# EAGLE board MCU_integrated (EAGLE 8.4.1)
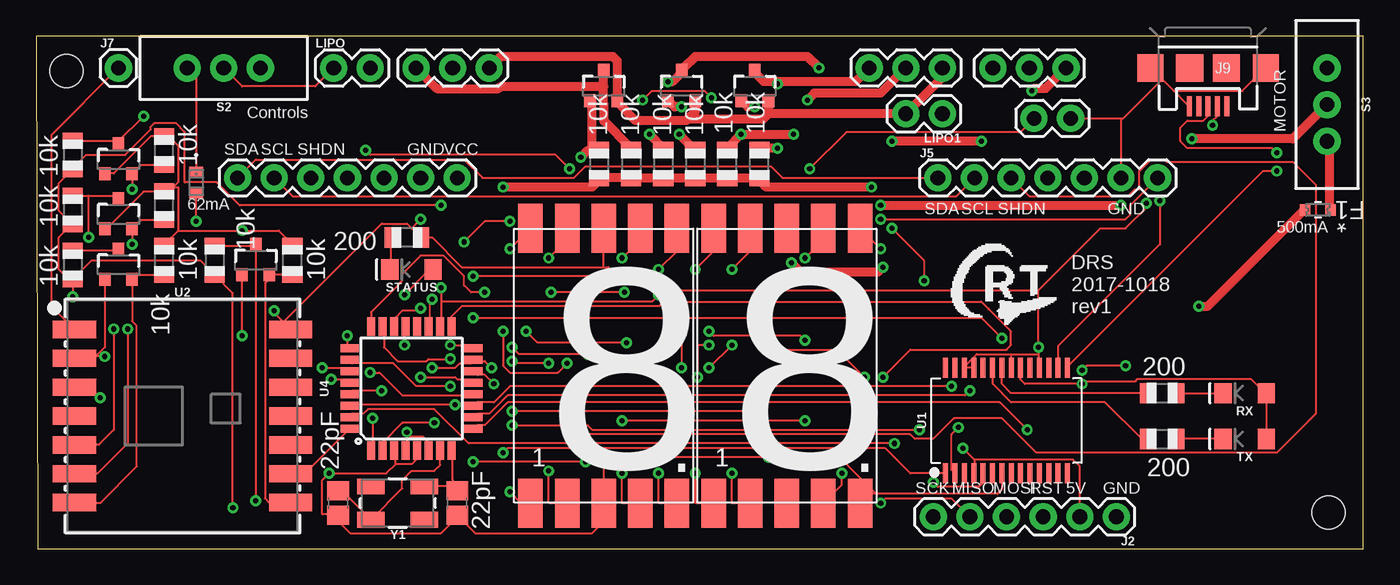
[diagram p0: board, top side]
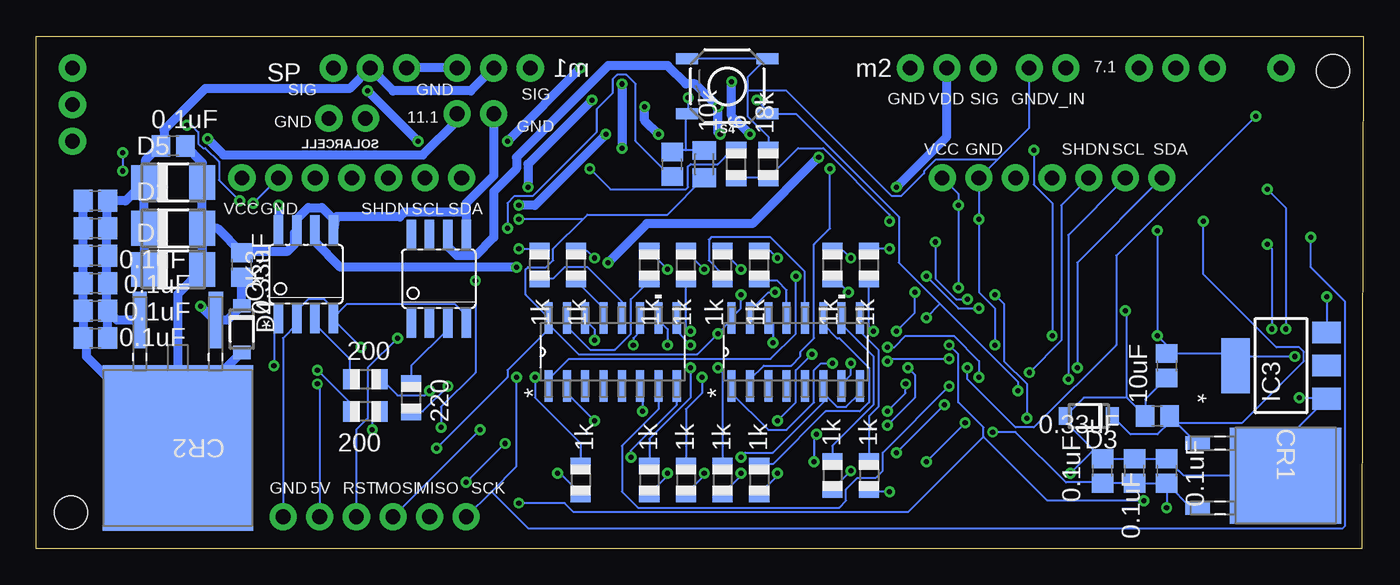
[diagram p1: board, bottom side, seen from below]

Size 92.06 x 35.55 mm. Coordinates in mm from the lower left corner, seen from the top.
Outline: 0.1,0 92.06,0 92.06,35.55 0,35.55 0.1,0
Copper layers (1*16): Top 0.035mm / dielectric 1.5mm / Bottom 0.035mm
Design rules "default": minimum track width 6mil, minimum drill 0.35mm, track to track 6mil, track to pad 6mil, pad to pad 6mil, via to via 6mil, smd to smd 6mil, copper to edge 40mil, drill to drill 6mil, minimum pad ring 10mil, minimum via ring 8mil, stop-mask expansion 4mil, vias tented up to drill 0mil, thermal gap 10mil
Net classes: 1 motor: width 0.61 mm
Holes 2.29 mm at 89.65,2.52 2.1,33.14

## Footprints (pad centres in the part's own frame; a part is rotated, then mirrored left to right if it is on the bottom)
R0805 = smd 1.1 x 1.4: 1 -1,0; 2 1,0
C0805 = smd 1.3 x 1.5: 1 -0.85,0; 2 0.85,0
DPAK = smd 0.94 x 1.702: 1 -2.25,-6.109; 2 2.25,-6.109 | smd 6.655 x 7.722: 3 0,0
D2PAK = smd 0.991 x 3.912: 1 -2.64,-8.877; 3 2.64,-8.877 | smd 10.439 x 11.455: 2 0,0
DO-214AC = smd 1.8 x 2.4: A 2.025,0; C -2.025,0
SOD123FL = smd 0.91 x 1.22: A 1.625,0; C -1.625,0
0467SERIES = smd 0.737 x 0.813: 1 -0.889,0; 2 0.889,0
0603 = smd 0.711 x 0.965: 1 -0.724,0; 2 0.724,0
SOT223 = smd 1.5 x 2: 1 -2.3,-3.15; 2 0,-3.15; 3 2.3,-3.15 | smd 3.8 x 2: 4 0,3.15
1X06 = drill 1.016 pad 1.88: 1 0,0; 2 2.54,0; 3 5.08,0; 4 7.62,0; 5 10.16,0; 6 12.7,0
1X07 = drill 1.016 pad 1.88: 1 0,0; 2 2.54,0; 3 5.08,0; 4 7.62,0; 5 10.16,0; 6 12.7,0; 7 15.24,0
1X01 = drill 1.016 pad 1.88: 1 0,0
USB-MICROB = smd 0.35 x 1.4: D+ 0,2.65; D- -0.65,2.65; GND 1.3,2.65; ID 0.65,2.65; VBUS -1.3,2.65 | smd 1.8 x 1.9: MT1 -4,0; MT2 4,0 | smd 1.9 x 1.9: P$1 -1.27,0; P$2 1.27,0
1X02 = drill 1.016 pad 1.88: 1 0,0; 2 2.54,0
1X03 = drill 1.016 pad 1.88: 1 0,0; 2 2.54,0; 3 5.08,0
SOIC08 = smd 0.66 x 2.032: 1 -1.905,-3.073; 2 -0.635,-3.073; 3 0.635,-3.073; 4 1.905,-3.073; 5 1.905,3.073; 6 0.635,3.073; 7 -0.635,3.073; 8 -1.905,3.073
ACSC56 = smd 1.7 x 3.4: PIN1 -5.08,-9.525; PIN2 -2.54,-9.525; PIN3 0,-9.525; PIN4 2.54,-9.525; PIN5 5.08,-9.525; PIN6 5.08,9.525; PIN7 2.54,9.525; PIN8 0,9.525; PIN9 -2.54,9.525; PIN10 -5.08,9.525
SOT23-3 = smd 0.8 x 0.9: 1 -0.95,-1; 2 0.95,-1; 3 0,1.1
M0805 = smd 1.3 x 1.6: 1 -0.95,0; 2 0.95,0
LED-1206 = smd 1.2 x 1.4: A -1.5,0; C 1.5,0
SWITCH_SPDT_PTH_11.6X4.0MM = drill 1.016 pad 1.88: 1 0,2.54; 2 0,0; 3 0,-2.54
TACTILE_SWITCH_SMD_5.2MM = smd 1.524 x 0.762: 1 -2.794,1.905; 2 2.794,1.905; 3 -2.794,-1.905; 4 2.794,-1.905
SSOP28DB = smd 0.348 x 1.397: 1 -4.225,-3.656; 2 -3.575,-3.656; 3 -2.925,-3.656; 4 -2.275,-3.656; 5 -1.625,-3.656; 6 -0.975,-3.656; 7 -0.325,-3.656; 8 0.325,-3.656; 9 0.975,-3.656; 10 1.625,-3.656; 11 2.275,-3.656; 12 2.925,-3.656; 13 3.575,-3.656; 14 4.225,-3.656; 15 4.225,3.656; 16 3.575,3.656; 17 2.925,3.656; 18 2.275,3.656; 19 1.625,3.656; 20 0.975,3.656; 21 0.325,3.656; 22 -0.325,3.656; 23 -0.975,3.656; 24 -1.625,3.656; 25 -2.275,3.656; 26 -2.925,3.656; 27 -3.575,3.656; 28 -4.225,3.656
RFM69CW-XXXS2 = smd 3 x 1.2: 1 -7.5,6; 2 -7.5,4; 3 -7.5,2; 4 -7.5,0; 5 -7.5,-2; 6 -7.5,-4; 7 -7.5,-6; 8 7.5,-6; 9 7.5,-4; 10 7.5,-2; 11 7.5,0; 12 7.5,2; 13 7.5,4; 14 7.5,6
D16 = smd 2.184 x 0.559: 1 -2.362,4.445; 2 -2.362,3.175; 3 -2.362,1.905; 4 -2.362,0.635; 5 -2.362,-0.635; 6 -2.362,-1.905; 7 -2.362,-3.175; 8 -2.362,-4.445; 9 2.362,-4.445; 10 2.362,-3.175; 11 2.362,-1.905; 12 2.362,-0.635; 13 2.362,0.635; 14 2.362,1.905; 15 2.362,3.175; 16 2.362,4.445
TQFP32-08 = smd 1.27 x 0.559: 1 -4.293,2.8; 2 -4.293,2; 3 -4.293,1.2; 4 -4.293,0.4; 5 -4.293,-0.4; 6 -4.293,-1.2; 7 -4.293,-2; 8 -4.293,-2.8; 17 4.293,-2.8; 18 4.293,-2; 19 4.293,-1.2; 20 4.293,-0.4; 21 4.293,0.4; 22 4.293,1.2; 23 4.293,2; 24 4.293,2.8 | smd 0.559 x 1.27: 9 -2.8,-4.293; 10 -2,-4.293; 11 -1.2,-4.293; 12 -0.4,-4.293; 13 0.4,-4.293; 14 1.2,-4.293; 15 2,-4.293; 16 2.8,-4.293; 25 2.8,4.293; 26 2,4.293; 27 1.2,4.293; 28 0.4,4.293; 29 -0.4,4.293; 30 -1.2,4.293; 31 -2,4.293; 32 -2.8,4.293
CRYSTAL-SMD-5X3.2-4PAD = smd 1.9 x 1.1: 1 -1.85,-1.15; 2 1.85,-1.15; 3 1.85,1.15; 4 -1.85,1.15

## Placement (x,y rotation side)
1K1  1k  [R0805]  44.45,19.68 90 bottom
1K2  1k  [R0805]  41.91,4.76 270 bottom
1K3  1k  [R0805]  36.83,5.08 270 bottom
1K4  1k  [R0805]  34.29,5.08 270 bottom
1K5  1k  [R0805]  36.83,19.68 90 bottom
1K6  1k  [R0805]  34.29,19.68 90 bottom
1K7  1k  [R0805]  44.45,4.76 270 bottom
1K8  1k  [R0805]  54.61,19.68 90 bottom
1K9  1k  [R0805]  57.15,19.68 90 bottom
1K10  1k  [R0805]  54.29,4.76 270 bottom
1K11  1k  [R0805]  49.53,4.76 270 bottom
1K12  1k  [R0805]  46.99,4.76 270 bottom
1K13  1k  [R0805]  49.53,19.68 90 bottom
1K14  1k  [R0805]  46.99,19.68 90 bottom
1KR  1k  [R0805]  41.91,19.68 90 bottom
C1  22pF  [C0805]  20.95,3.17 90 top
C2  22pF  [C0805]  29.21,3.17 90 top
C3  0.1uF  [C0805]  13.65,5.4 90 bottom
C4  0.1uF  [C0805]  47.94,26.67 270 bottom
C5  0.1uF  [C0805]  87.95,20.32 180 bottom
C6  0.1uF  [C0805]  87.95,16.51 0 bottom
C7  0.1uF  [C0805]  87.95,18.41 0 bottom
C8  0.1uF  [C0805]  87.95,14.61 180 bottom
C9  0.33uF  [C0805]  14.29,9.21 180 bottom
C10  0.1uF  [C0805]  18.1,5.4 90 bottom
C11  0.33uF  [C0805]  77.79,19.68 90 bottom
C12  0.1uF  [C0805]  87.95,24.13 180 bottom
C13  0.1uF  [C0805]  15.88,5.4 90 bottom
C14  10uF  [C0805]  13.65,12.7 270 bottom
C15  0.1uF  [C0805]  82.55,27.94 0 bottom
C16  0.1uF  [C0805]  87.95,22.23 180 bottom
CR1  L7805CDT-TR  [DPAK]  5.4,5.08 270 bottom
CR2  L7806CD2T-TR  [D2PAK]  82.23,6.99 180 bottom
D1  [DO-214AC]  82.55,19.37 0 bottom
D2  [DO-214AC]  82.55,22.23 0 bottom
D3  SMF5.0AT1  [SOD123FL]  19.05,9.21 180 bottom
D4  SMF5.0AT1  [SOD123FL]  77.79,15.24 270 bottom
D5  [DO-214AC]  82.55,25.4 0 bottom
F1  6V/.4A  [0467SERIES]  88.9,23.5 180 top
F2  5V/80mA  [0603]  11.11,25.4 270 top
IC3  LD117AS25TR  [SOT223]  5.71,12.7 90 bottom
J2  [1X06]  74.93,2.22 180 top
J4  [1X07]  13.97,25.72 0 top
J5  [1X07]  62.55,25.72 0 top
J7  [1X01]  5.71,33.34 0 top
J9  USB-MICROB  [USB-MICROB]  81.28,33.34 180 top
LIPO  [1X02]  20.64,33.34 0 top
LIPO1  [1X02]  62.87,30.16 180 top
M1  m2  [1X03]  26.35,33.34 0 top
M2  SP  [1X03]  71.44,33.34 180 top
M3  m1  [1X03]  57.78,33.34 0 top
OK1  ILD205  [SOIC08]  64.14,18.73 0 bottom
OK3  ILD205  [SOIC08]  73.34,19.05 0 bottom
ONES  ACSC56SMT  [ACSC56]  39.37,12.7 0 top
Q1  220mA/50V/3.5Ω  [SOT23-3]  15.24,20 0 top
Q2  220mA/50V/3.5Ω  [SOT23-3]  5.71,19.68 0 top
Q4  220mA/50V/3.5Ω  [SOT23-3]  5.71,26.99 0 top
Q5  220mA/50V/3.5Ω  [SOT23-3]  5.71,23.18 0 top
Q7  220mA/50V/3.5Ω  [SOT23-3]  44.77,32.07 0 top
Q8  220mA/50V/3.5Ω  [SOT23-3]  39.37,32.07 0 top
Q9  220mA/50V/3.5Ω  [SOT23-3]  49.85,32.07 0 top
R1  220  [R0805]  66.04,10.48 90 bottom
R2  200  [R0805]  69.22,9.53 180 bottom
R3  10k  [R0805]  39.05,26.67 270 top
R4  10k  [R0805]  41.27,26.67 270 top
R5  10k  [R0805]  47.94,26.67 90 top
R6  200  [R0805]  69.22,11.75 180 bottom
R7  10k  [R0805]  50.16,26.67 90 top
R8  6  [R0805]  43.5,26.67 90 bottom
R9  18k  [R0805]  41.27,26.67 90 bottom
R10  10k  [R0805]  45.72,26.67 270 top
R11  10k  [R0805]  43.5,26.67 270 top
R14  10k  [R0805]  12.38,20 270 top
R15  10k  [R0805]  2.54,23.5 270 top
R16  10k  [M0805]  45.72,26.67 270 bottom
R17  200  [R0805]  78.11,7.62 0 top
R18  10k  [R0805]  8.89,23.81 90 top
R19  10k  [R0805]  17.78,20 90 top
R20  10k  [R0805]  8.89,27.62 90 top
R21  10k  [R0805]  2.54,19.68 270 top
R22  200  [R0805]  78.11,10.79 0 top
R23  200  [R0805]  25.72,21.59 180 top
R25  10k  [R0805]  8.89,20 90 top
R26  10k  [R0805]  2.54,27.3 270 top
RX  [LED-1206]  83.82,10.79 180 top
S2  [SWITCH_SPDT_PTH_11.6X4.0MM]  13.02,33.34 90 top
S3  [SWITCH_SPDT_PTH_11.6X4.0MM]  89.53,30.8 180 top
S4  MOMENTARY-SWITCH-SPST-SMD-5.2-REDUNDANT  [TACTILE_SWITCH_SMD_5.2MM]  44.13,32.07 180 bottom
SOLARCELL  [1X02]  69.22,29.84 0 top
STATUS  [LED-1206]  26.04,19.37 180 top
TENTHS  ACSC56SMT  [ACSC56]  52.07,12.7 0 top
TX  [LED-1206]  83.82,7.62 180 top
U1  FT232RL  [SSOP28DB]  67.31,8.89 0 top
U2  915MHz  [RFM69CW-XXXS2]  10.16,9.21 0 top
U3  SN74LS247_D_16  [D16]  39.37,13.65 90 bottom
U4  ATMEGA328P_TQFP  [TQFP32-08]  26.04,11.11 90 top
U5  SN74LS247_D_16  [D16]  52.07,13.65 90 bottom
Y1  16MHz  [CRYSTAL-SMD-5X3.2-4PAD]  25.08,3.17 180 top

## Library data of the parts
1K1-1K14 1KR C1-C16 R1-R11 R14-R23 R25 R26 = adafruit
CR1 = 7805; MANUFACTURER_PART_NUMBER: L7805CDTTR; VENDOR: ST Microelectronics
CR2 = 7806; MANUFACTURER_PART_NUMBER: L7806CD2TTR; VENDOR: ST Microelectronics
D1-D5 = diode
F1 = fuse0603_groove; MANUFACTURER_PART_NUMBER: 0467.500NRHF; VENDOR: Littelfuse Inc
F2 = fuse0603; MANUFACTURER_PART_NUMBER: F0603G0R10FNTR; VENDOR: AVX Corporation
IC3 = v-reg
J2 = SparkFun-Connectors; PROD_ID: CONN-08437
J4 J5 J7 LIPO LIPO1 SOLARCELL = SparkFun-Connectors
J9 = SparkFun-Retired; PROD_ID: CONN-09505
M1-M3 = SparkFun-Electromechanical
OK1 OK3 = optocoupler; MF: VISHAY/TELEFUNKEN; MPN: ILD205T; OC_FARNELL: 1469512; OC_NEWARK: 20H8678
ONES TENTHS = Feesta-parts
Q1 Q2 Q4 Q5 Q7-Q9 = SparkFun-DiscreteSemi; PROD_ID: TRANS-00830
RX STATUS TX = SparkFun-LED
S2 S3 = SparkFun-Switches; PROD_ID: SWCH-08261; SF_SKU: COM-00102
S4 = SparkFun-Switches; PROD_ID: SWCH-08247; SF_SKU: COM-08720
U1 = SparkFun-IC-Comms; PROD_ID: IC-00870
U2 = SparkFun-RF; PROD_ID: IC-11996
U3 U5 = BCD7Decoder; DATASHEETURL: httpwww.ti.comlitgpnSN74LS247; FAMILY_NAME: DECODERDEMULTIPLEXER; GENERIC_PART_NUMBER: SN74LS247; INDUSTRY_STD_PKG_TYPE: SOIC; MANUFACTURER: Texas Instruments; PACKAGE_DESIGNATOR: D; PIN_COUNT: 16
U4 = SparkFun-IC-Microcontroller; PROD_ID: IC-09069
Y1 = SparkFun-Clocks; PROD_ID: XTAL-08218; SF_ID: COM-00094

## Nets
1_A: 1KR.2 ONES.PIN7
1_B: 1K1.2 ONES.PIN6
1_C: 1K2.2 ONES.PIN4
1_D: 1K3.2 ONES.PIN2
1_DP: 1K7.2 ONES.PIN5
1_E: 1K4.2 ONES.PIN1
1_F: 1K5.2 ONES.PIN9
1_G: 1K6.2 ONES.PIN10
3.3MISO: Q1.2 R19.1 U2.8
3.3MOSI: Q4.2 R20.1 U2.5
3.3NSS: Q2.2 R25.1 U2.7
3.3SCK: Q5.2 R18.1 U2.6
3.3VCC: C14.1 IC3.4 Q1.1 Q2.1 Q4.1 Q5.1 R18.2 R19.2 R20.2 R25.2 U2.2
6V_POWER [motor]: C5.1 C6.2 C7.2 C8.1 C12.1 C15.1 C16.1 CR2.3 D1.C D2.C D5.C M1.2 M2.2 M3.2 R3.2 R4.2 R5.1 R7.1 R10.2 R11.2
10_A: 1K8.2 TENTHS.PIN7
10_B: 1K9.2 TENTHS.PIN6
10_C: 1K10.2 TENTHS.PIN4
10_D: 1K11.2 TENTHS.PIN2
10_E: 1K12.2 TENTHS.PIN1
10_F: 1K13.2 TENTHS.PIN9
10_G: 1K14.2 TENTHS.PIN10
A1: U3.7 U4.23
A2: U4.26 U5.7
ANT: J7.1 U2.1
B1: U3.1 U4.24
B2: U4.22 U5.1
C1: U3.2 U4.25
C2: U4.13 U5.2
D2: U4.14 U5.6
D4: J5.3 U4.2
D8: J4.3 U4.12
D-: J9.D- U1.16
DRAIN1 [motor]: M3.1 Q9.3 R7.2
DRAIN2 [motor]: M1.1 Q8.3 R4.1
DRAIN3 [motor]: M2.1 Q7.3 R11.1
GND: C1.1 C2.1 C3.2 C9.2 C10.2 C13.2 C14.2 CR1.3 D3.A IC3.1 J2.1 J4.6 J5.6 J9.GND J9.MT1 J9.MT2 LIPO.2 OK1.4 OK3.2 OK3.4 ONES.PIN3 ONES.PIN8 R9.2 R23.1 S4.3 S4.4 SOLARCELL.2 TENTHS.PIN5 U1.7 U1.18 U1.21 U1.25 U1.26 U2.3 U2.14 U3.6 U3.8 U4.3 U4.5 U4.21 U5.8
INT: U2.9 U4.32
M1_SIG: R2.1 U4.9
M2_SIG: R6.1 U4.10
MGND [motor]: C5.2 C6.1 C7.1 C8.2 C11.2 C12.2 C15.2 C16.2 CR2.2 D1.A D2.A D4.A D5.A LIPO1.2 M1.3 M2.3 M3.3 OK1.5 OK3.5 OK3.7 Q7.2 Q8.2 Q9.2
MISO: J2.5 Q1.3 R14.1 U4.16
MOSI: J2.4 Q4.3 R26.1 U4.15
N$1: R22.2 RX.C
N$2: R17.2 TX.C
N$3: R17.1 U1.23
N$4: C1.2 U4.7 Y1.3
N$5: C2.2 U4.8 Y1.1
N$6: R8.2 SOLARCELL.1
N$7: R23.2 STATUS.C
N$8: OK1.3 R1.2
N$9: OK3.1 R2.2
N$10: STATUS.A U4.1
N$13: J9.D+ U1.15
N$15: C4.2 U1.2
N$17: OK3.3 R6.2
N$19: LIPO.1 S2.2
N$20: F2.1 S2.1
N$21: C9.1 CR1.1 D3.C F2.2
N$22 [motor]: LIPO1.1 S3.2
N$24 [motor]: F1.1 S3.1
N$25 [motor]: C11.1 CR2.1 D4.C F1.2
N$32: 1KR.1 U3.13
N$33: 1K1.1 U3.12
N$34: 1K2.1 U3.11
N$35: 1K3.1 U3.10
N$36: 1K4.1 U3.9
N$37: 1K5.1 U3.15
N$38: 1K6.1 U3.14
N$43: 1K8.1 U5.13
N$44: 1K9.1 U5.12
N$45: 1K10.1 U5.11
N$46: 1K11.1 U5.10
N$47: 1K12.1 U5.9
N$48: 1K13.1 U5.15
N$49: 1K14.1 U5.14
RESET: C4.1 J2.3 R16.1 S4.1 S4.2 U4.29
RX: U1.5 U4.31
RXLED: R22.1 U1.22
SCK: J2.6 Q5.3 R15.1 U4.17
SCL: J4.2 J5.2 U4.28
SDA: J4.1 J5.1 U4.27
SIG1 [motor]: OK3.8 Q9.1 R5.2
SIG2 [motor]: OK3.6 Q8.1 R3.1
SIG3 [motor]: OK1.6 Q7.1 R10.1
SOLARIN: R8.1 R9.1 U4.19
SP_SIG: R1.1 U4.11
SS: Q2.3 R21.1
TX: U1.1 U4.30
VCC: 1K7.1 C3.1 C10.1 C13.1 CR1.2 IC3.3 J2.2 J4.7 J5.7 R14.2 R15.2 R16.2 R21.2 R26.2 RX.A TX.A U1.4 U1.20 U3.16 U4.4 U4.6 U4.18 U5.16

## Tracks (layer width: path | path; a pad name or v marks a point on that pad's centre or on a via)
1_A  (via drill 0.35)
  Top 0.152: v40.64,20.16 41.91,21.43 ONES.PIN7
  Bottom 0.152: v40.64,20.16 41.12,20.64 41.91,20.64 1KR.2
1_B  (via drill 0.35)
  Top 0.152: v43.18,19.37 44.45,20.64 ONES.PIN6
  Bottom 0.152: v43.18,19.37 44.45,20.64 1K1.2
1_C  (via drill 0.35)
  Top 0.152: v40.64,5.24 40.64,3.17 ONES.PIN4
  Bottom 0.152: v40.64,5.24 40.64,5.08 41.91,3.81 1K2.2
1_D  (via drill 0.35)
  Top 0.152: v35.56,5.4 35.56,3.17 ONES.PIN2
  Bottom 0.152: v35.56,5.4 36.83,4.13 1K3.2
1_DP  (via drill 0.35)
  Top 0.152: v43.18,5.24 43.18,3.17 ONES.PIN5
  Bottom 0.152: v43.18,5.24 43.18,5.08 44.45,3.81 1K7.2
1_E  (via drill 0.35)
  Top 0.152: v32.86,3.97 33.66,3.17 ONES.PIN1
  Bottom 0.152: v32.86,3.97 34.29,3.97 1K4.2
1_F  (via drill 0.35)
  Top 0.152: v35.56,20.16 36.83,21.43 ONES.PIN9
  Bottom 0.152: v35.56,20.16 36.04,20.64 36.83,20.64 1K5.2
1_G  (via drill 0.35)
  Top 0.152: ONES.PIN10 v32.86,20.8
  Bottom 0.152: v32.86,20.8 34.29,20.8 1K6.2
3.3MISO
  Top 0.152: R19.1 Q1.2 16.19,18.73 15.88,18.41 15.88,3.49 16.16,3.21 U2.8
3.3MOSI  (via drill 0.35)
  Top 0.152: R20.1 7.3,26.62 Q4.2 v6.67,24.92 | v5.4,15.24 5.4,8.26 4.35,7.21 U2.5
  Bottom 0.152: v6.67,24.92 5.4,23.65 v5.4,15.24
3.3NSS
  Top 0.152: R25.1 6.98,19 Q2.2 6.67,15.78 6.96,15.49 6.96,5.74 6.99,5.71 4.45,3.17 2.69,3.17 U2.7
3.3SCK  (via drill 0.35)
  Top 0.152: R18.1 7.3,22.81 Q5.2 v6.67,21.11 | v6.35,15.24 6.35,7.3 4.25,5.21 U2.6
  Bottom 0.152: v6.67,21.11 6.35,20.8 v6.35,15.24
3.3VCC  (via drill 0.35)
  Top 0.152: U2.2 2.79,13.34 4.13,13.34 | Q2.1 4.76,13.97 4.13,13.34 | Q4.1 4.81,26.04 5.4,26.04 7.99,28.62 R20.2 9.16,28.62 9.84,27.94 9.84,25.4 9.53,25.08 | 9.53,25.08 9.16,25.08 R18.2 | v4.76,13.34 4.13,13.34 | v14.29,14.76 14.29,18.89 Q1.1 | Q5.1 4.92,22.23 7.46,24.77 8.89,24.77 R18.2 | 9.84,22.07 8.89,21.11 R25.2 | 9.84,22.07 9.84,25.08 9.53,25.08 | 9.53,25.08 R18.2 | 9.84,22.07 v14.29,22.07 16.83,22.07 17.78,21.11 R19.2
  Bottom 0.152: v4.76,13.34 8.23,13.34 IC3.4 9.71,13.55 C14.1 13.02,13.49 v14.29,14.76 v14.29,22.07
6V_POWER  (via drill 0.35)
  Top 0.61: v32.38,25.08 38.58,25.08 38.89,25.4 R3.2 39.05,25.72 41.27,25.72 R4.2 41.43,25.72 43.5,25.72 R11.2 43.66,25.72 45.72,25.72 R10.2 45.88,25.72 47.94,25.72 R5.1 48.1,25.72 50.16,25.72 R7.1 50.32,25.4 50.64,25.08 v57.94,25.08 | v53.5,31.11 53.98,31.59 58.58,31.59 M3.2
  Bottom 0.61: D5.C D2.C D1.C | D5.C 84.45,25.52 84.45,26.99 83.5,27.94 C15.1 83.19,28.1 83.19,29.05 80.33,31.91 70.33,31.91 M2.2 67.31,31.75 61.91,31.75 M3.2 | CR2.3 86.45,15.86 C6.2 | D5.C 85.84,24.13 C12.1 87.15,23.97 87.15,22.23 C16.1 87.15,22.07 87.15,20.48 C5.1 87.15,20.32 87.15,18.57 C7.2 87.15,18.41 87.15,16.67 C6.2 | C8.1 C6.2 | M1.2 28.89,28.57 v32.38,25.08 | v57.94,25.08 57.94,26.67 v53.5,31.11
10_A  (via drill 0.35)
  Top 0.152: v53.34,20.16 54.61,21.43 TENTHS.PIN7
  Bottom 0.152: v53.34,20.16 53.82,20.64 54.61,20.64 1K8.2
10_B  (via drill 0.35)
  Top 0.152: TENTHS.PIN6 v58.58,20.8
  Bottom 0.152: v58.58,20.8 57.15,20.8 1K9.2
10_C  (via drill 0.35)
  Top 0.152: TENTHS.PIN4 55.88,4.45 v55.88,5.24
  Bottom 0.152: v55.88,5.24 55.72,5.24 54.29,3.81 1K10.2
10_D  (via drill 0.35)
  Top 0.152: v48.26,5.24 48.26,3.17 TENTHS.PIN2
  Bottom 0.152: v48.26,5.24 48.26,5.08 49.53,3.81 1K11.2
10_E  (via drill 0.35)
  Top 0.152: v45.72,5.24 45.72,3.17 TENTHS.PIN1
  Bottom 0.152: v45.72,5.24 45.72,5.08 46.99,3.81 1K12.2
10_F  (via drill 0.35)
  Top 0.152: v48.26,19.37 49.53,20.64 TENTHS.PIN9
  Bottom 0.152: v48.26,19.37 49.53,20.64 1K13.2
10_G  (via drill 0.35)
  Top 0.152: v45.72,19.37 46.99,20.64 TENTHS.PIN10
  Bottom 0.152: v45.72,19.37 46.99,20.64 1K14.2
A1  (via drill 0.35)
  Top 0.152: v33.02,13.02 33.18,12.86 v35.56,12.86 | 24.13,15.4 U4.23 24.13,15.31 24.13,13.97 25.08,13.02 27.08,13.02 27.21,13.15 28.71,13.15 v28.73,13.18
  Bottom 0.152: v28.73,13.18 32.86,13.18 v33.02,13.02 | v35.56,12.86 35.56,12.06 36.2,11.43 U3.7
A2  (via drill 0.35)
  Top 0.152: v28.73,11.27 26.35,11.27 24.77,12.86 21.91,12.86 21.75,13.02 U4.26
  Bottom 0.152: v28.73,11.27 33.34,6.67 33.34,5.4 33.81,4.92 35.08,4.92 35.88,4.13 35.88,3.33 36.35,2.86 50.32,2.86 51.44,3.97 51.44,7.14 48.9,9.68 U5.7
ANT
  Top 0.152: U2.1 1.09,16.77 1.09,28.71 J7.1
B1  (via drill 0.35)
  Top 0.152: v36.83,12.86 36.2,12.22 32.86,12.22 32.38,12.7 v32.38,15.08 | U4.24 23.34,15.56 | U4.24 | v31.11,17.78 30.16,17.78 29.69,18.26 29.69,18.89 28.26,20.32 26.67,20.32 25.36,19.01 25.36,18.57 25.24,18.45 25.24,18.41 23.24,16.41 U4.24
  Bottom 0.152: v31.11,17.78 31.11,16.35 v32.38,15.08 | v36.83,12.86 37.62,12.86 38.1,12.38 38.1,10.16 40.01,8.26 41.27,8.26 43.81,10.79 U3.1
B2  (via drill 0.35)
  Top 0.152: v39.37,18.89 v30.32,18.89 | U4.22 24.92,15.56 24.92,16.03 25.4,16.51 26.51,16.51 v26.67,16.67
  Bottom 0.152: v26.67,16.67 28.1,16.67 v30.32,18.89 | v39.37,18.89 39.37,14.92 41.12,13.18 55.09,13.18 56.52,11.75 U5.1
C1  (via drill 0.35)
  Top 0.152: v21.59,14.76 21.59,13.97 U4.25 | v22.86,27.62 23.18,27.3 36.04,27.3 v36.99,26.35
  Bottom 0.152: v21.59,14.76 21.59,23.97 22.86,25.24 v22.86,27.62 | v36.99,26.35 36.99,22.23 38.1,21.11 38.1,14.61 39.05,13.65 39.05,13.34 39.69,12.7 41.59,12.7 42.55,11.75 U3.2
C2  (via drill 0.35)
  Top 0.152: v26.67,11.91 29.05,11.91 29.21,11.75 30.16,11.75 30.32,11.59 U4.13 | v33.02,13.97 33.5,13.49 v38.26,13.49 | v53.34,8.89 v40.64,8.89
  Bottom 0.152: v26.67,11.91 26.67,13.02 28.42,14.76 31.75,14.76 32.54,13.97 v33.02,13.97 | v38.26,13.49 39.37,12.38 39.37,10.16 v40.64,8.89 | v53.34,8.89 55.24,10.79 U5.2
D2  (via drill 0.35)
  Top 0.152: v31.75,11.43 31.11,12.06 30.64,12.06 30.48,12.22 U4.14 | v50.01,9.53 v33.02,9.53
  Bottom 0.152: v31.75,11.43 31.75,10.79 v33.02,9.53 | v50.01,9.53 50.01,11.11 50.16,11.27 U5.6
D4  (via drill 0.35)
  Top 0.152: v27.62,8.73 25.4,8.73 24.13,7.46 24.13,6.83 U4.2 | v38.1,6.03 v30.32,6.03 | v37.94,7.94 60.64,7.94 60.96,7.62 62.23,7.62 63.66,9.05 66.99,9.05 69.37,6.67 86.04,6.67 88.74,9.37 88.74,25.24 87.15,26.83 78.42,26.83 78.26,26.99 77.31,26.99 76.52,26.19 76.52,24.92 76.2,24.92 75.72,24.45 68.9,24.45 J5.3
  Bottom 0.152: v30.32,6.03 v27.62,8.73 | v38.1,6.03 38.1,7.78 v37.94,7.94
D8  (via drill 0.35)
  Top 0.152: v23.18,12.22 23.81,12.22 25.4,10.64 30.32,10.64 U4.12
  Bottom 0.152: v23.18,12.22 20.95,14.45 20.95,23.81 J4.3
D-  (via drill 0.35)
  Top 0.152: v77.95,24.13 77.95,21.11 70.89,14.05 U1.16 70.96,12.7 | v81.6,29.37 81.6,29.69 81.92,30 81.92,30.64 J9.D-
  Bottom 0.152: v77.95,24.13 79.38,25.56 79.38,26.83 80.33,27.78 80.49,27.78 80.8,28.1 80.8,28.89 81.28,29.37 v81.6,29.37
DRAIN1  (via drill 0.35)
  Top 0.61: 51.44,32.38 56.83,32.38 M3.1 | 51.44,32.38 50.48,32.38 49.85,33.02 Q9.3 | v51.44,27.78 50.16,27.78 R7.2 | v51.44,32.23 51.44,32.38
  Bottom 0.61: v51.44,32.23 v51.44,27.78
DRAIN2
  Top 0.61: 39.37,32.07 Q8.3 | R4.1 41.27,27.78 39.38,29.68 39.38,30.77 39.37,30.83 39.37,32.07 | 39.37,32.07 32.23,32.07 32.07,31.91 27.78,31.91 M1.1
DRAIN3  (via drill 0.35)
  Top 0.61: v43.81,32.38 44.13,32.38 44.77,33.02 Q7.3 44.93,33.34 45.72,34.13 53.5,34.13 v54.29,33.34 | v42.55,28.73 43.5,27.78 R11.1 | v65.56,28.26 v59.37,28.26 | v69.06,31.75 69.22,31.91 70.01,31.91 M2.1
  Bottom 0.61: v43.81,32.38 43.81,30 v42.55,28.73 | v59.37,28.26 v54.29,33.34 | v69.06,31.75 v65.56,28.26
GND  (via drill 0.35)
  Top 0.152: 29.26,2.27 C2.1 | 29.26,2.27 30.44,1.09 38.56,1.09 39.37,1.91 ONES.PIN3 39.37,6.35 v43.18,6.35 v50.8,6.35 51.28,5.87 56.2,5.87 58.26,3.81 | 29.26,2.27 28.08,1.09 21.77,1.09 20.95,1.91 C1.1 20.95,2.38 19.84,2.38 19.84,4.76 v20.32,5.24 24.29,5.24 24.92,5.87 | U2.3 3.71,11.21 v4.45,10.48 | v16.51,16.51 16.51,16.36 U2.14 17.14,15.72 23.97,22.54 25.72,22.54 26.04,22.23 | 78.11,32.54 77.31,33.34 J9.MT2 78.11,32.54 | 78.11,32.54 78.9,31.75 | 78.9,31.75 79.85,30.8 J9.GND | 78.9,31.75 83.66,31.75 85.25,33.34 J9.MT1 | 75.25,29.84 J5.6 | SOLARCELL.2 75.25,29.84 | 78.11,32.54 75.41,29.84 75.25,29.84 | U1.25 64.93,12.54 64.45,12.54 U1.26 64.45,12.7 65.25,13.49 67.63,13.49 | 67.63,13.49 67.63,12.7 U1.21 | 69.53,13.49 69.53,12.7 U1.18 | 67.63,13.49 69.53,13.49 | 69.53,13.49 v69.53,13.97 69.53,17.94 | 26.04,22.23 26.67,21.59 R23.1 27.46,21.59 29.53,19.53 39.37,19.53 | 39.37,19.53 ONES.PIN8 | v25.56,14.13 25.56,15.4 U4.21 | v26.67,22.86 26.04,22.23 | 24.92,5.87 24.92,6.67 U4.3 | 24.92,5.87 26.04,5.87 26.35,6.19 26.35,6.67 U4.5 | 58.26,3.81 57.78,3.81 TENTHS.PIN5 | 69.53,17.94 43.81,17.94 43.02,18.73 40.48,18.73 39.69,19.53 39.37,19.53 | v76.99,23.97 76.99,23.65 75.56,22.23 73.82,22.23 69.53,17.94 | U1.7 66.98,4.12 66.67,3.81 58.26,3.81
  Bottom 0.152: C10.2 C13.2 C3.2 12.83,5.43 12.81,5.43 12.46,5.08 5.71,5.08 | C14.2 15.14,10.37 C9.2 16.41,10.48 | 5.71,5.08 CR1.3 | C10.2 20.68,8.82 D3.A 19.41,10.48 16.41,10.48 | 2.83,10.13 IC3.1 | 2.83,10.13 5.71,7.25 5.71,5.08 | v4.45,10.48 3.17,10.48 2.83,10.13 | 16.41,10.48 16.41,16.41 v16.51,16.51 | OK1.4 62.23,16.19 63.02,16.99 70.48,16.99 71.12,16.35 | 71.12,16.35 71.44,16.03 OK3.4 | 71.12,16.35 72.07,17.3 73.18,17.3 73.98,16.51 OK3.2 73.98,15.56 74.93,14.61 J2.1 | 71.12,16.35 OK3.4 | v69.53,13.97 71.44,15.88 OK3.4 | v76.99,23.97 J5.6 | R9.2 41.27,28.57 42.7,30 42.7,31.75 | 42.7,31.75 42.7,32.7 41.43,33.97 | 41.43,33.97 S4.4 | 41.43,33.97 S4.3 | v25.56,14.13 25.56,16.67 26.67,17.78 v26.67,22.86 J4.6 25.4,26.99 | LIPO.2 23.18,29.21 25.4,26.99 | 42.7,31.75 40.01,31.75 32.7,24.45 32.07,24.45 30.48,26.04 30.48,26.19 29.69,26.99 25.4,26.99 | U3.8 34.92,10.79 35.88,9.84 36.51,9.84 37.15,10.48 | 37.15,10.48 37.47,10.79 U3.6 | U5.8 47.62,10 50.8,6.83 v50.8,6.35 | 37.15,10.48 40.96,6.67 42.86,6.67 v43.18,6.35 | v20.32,5.24 18.73,6.83 C10.2
INT
  Top 0.152: U2.9 18.64,5.21 U4.32
M1_SIG  (via drill 0.35)
  Top 0.152: v68.74,8.26 66.83,10.16 32.7,10.16 31.11,8.57 30.64,8.57 30.48,8.41 U4.9
  Bottom 0.152: v68.74,8.26 68.74,9.05 68.26,9.53 R2.1
M2_SIG  (via drill 0.35)
  Top 0.152: v64.77,10.95 64.45,10.64 32.7,10.64 31.43,9.37 30.64,9.37 30.48,9.21 U4.10
  Bottom 0.152: v64.77,10.95 65.09,10.64 66.99,10.64 68.1,11.75 R6.1
MGND
  Top 0.61: M3.3 62.87,32.7 LIPO1.2 50.8,30.16 | 45.16,29.77 45.72,30.32 45.72,30.96 Q7.2 | 45.16,29.77 45.09,29.69 41.59,29.69 40.32,30.96 Q8.2 40.32,31.27 40.32,33.81 40.01,34.13 32.23,34.13 M1.3 | 50.8,30.96 Q9.2 50.8,30.16 | 45.16,29.77 50.4,29.77 50.8,30.16
  Bottom 0.61: C12.2 C16.2 C5.2 C7.1 C6.1 C8.2 88.58,14.39 88.58,13.34 CR2.2 | C15.2 80.53,26.77 D5.A D2.A | D2.A D1.A 82.23,17.66 CR2.2 | D4.A 82.23,9.17 CR2.2 | D2.A 79.48,22.23 C11.2 77.63,20.64 74.61,20.64 74.14,21.11 74.14,21.91 OK3.7 73.98,22.86 73.18,23.65 72.23,23.65 71.44,22.86 OK3.5 71.28,23.02 66.83,23.02 66.52,23.34 62.23,23.34 | M3.3 M2.3 | 62.23,23.34 62.23,23.97 60.33,25.88 LIPO1.2 | 62.23,23.34 OK1.5
MISO  (via drill 0.35)
  Top 0.152: R14.1 15.14,21 Q1.3 v15.24,3.33 | v28.73,14.13 30.16,14.13 30.32,13.97 U4.16 | J2.5 63.5,3.49 58.9,3.49 v58.58,3.17
  Bottom 0.152: v28.73,14.13 28.1,13.49 28.1,10.16 26.35,8.41 26.35,7.78 | 26.35,7.78 21.91,3.33 v15.24,3.33 | v58.58,3.17 55.4,3.17 54.77,2.54 31.59,2.54 26.35,7.78
MOSI  (via drill 0.35)
  Top 0.152: R26.1 5.5,28.3 Q4.3 5.56,28.26 5.71,28.26 v7.46,30 | v27.46,12.54 29.05,12.54 29.37,12.86 30.16,12.86 30.32,13.02 U4.15 30.48,13.02 31.11,13.02 v31.59,12.54 | v61.28,8.26 38.58,8.26 38.26,8.57 v33.02,8.57
  Bottom 0.152: v27.46,12.54 27.46,11.75 24.13,8.41 22.86,8.41 17.14,14.13 17.14,20.32 v7.46,30 | v61.28,8.26 J2.4 | v33.02,8.57 31.11,10.48 31.11,12.06 v31.59,12.54
N$1
  Top 0.152: R22.2 RX.C
N$2
  Top 0.152: TX.C R17.2
N$3
  Top 0.152: U1.23 66.36,12.54 66.36,11.43 67.63,10.16 74.14,10.16 76.68,7.62 R17.1 76.99,7.62
N$4
  Top 0.152: C1.2 21.23,4.03 Y1.3 25.4,4.19 25.4,4.76 26.04,5.4 27.62,5.4 28.04,5.81 U4.7
N$5
  Top 0.152: Y1.1 28.89,4.33 29.19,4.03 C2.2 29.21,4.45 28.89,4.76 28.89,6.76 U4.8
N$6  (via drill 0.35)
  Top 0.152: v53.66,26.35 56.2,28.89 68.26,28.89 SOLARCELL.1
  Bottom 0.152: v53.66,26.35 52.23,24.92 46.99,24.92 46.83,25.08 46.83,26.51 46.67,26.67 44.77,26.67 43.81,27.62 43.5,27.62 R8.2
N$7
  Top 0.152: STATUS.C 24.61,19.37 24.61,21.59 R23.2
N$8
  Bottom 0.152: R1.2 66.04,12.7 63.5,15.24 OK1.3
N$9  (via drill 0.35)
  Top 0.152: v72.55,12.38 72.87,12.7 v75.56,12.7
  Bottom 0.152: v72.55,12.38 70.33,10.16 70.33,9.53 R2.2 | v75.56,12.7 75.56,15.56 75.25,15.88 OK3.1
N$10  (via drill 0.35)
  Top 0.152: v23.34,9.05 23.34,6.83 U4.1 | v25.56,17.62 27.3,19.37 STATUS.A
  Bottom 0.152: v23.34,9.05 23.34,11.43 24.92,13.02 24.92,16.99 v25.56,17.62
N$13  (via drill 0.35)
  Top 0.152: v86.04,26.19 85.09,26.19 71.6,12.7 U1.15 | v86.04,27.46 85.72,27.78 79.85,27.78 79.38,28.26 79.38,29.21 79.85,29.69 80.96,29.69 81.28,30 J9.D+
  Bottom 0.152: v86.04,27.46 v86.04,26.19
N$15  (via drill 0.35)
  Top 0.152: 63.66,5.24 U1.2 63.5,5.47 63.5,7.94 v63.98,8.41 | v59.37,22.23 61.59,20 v61.59,18.57
  Bottom 0.152: v63.98,8.41 63.98,9.84 61.59,12.22 v61.59,18.57 | v59.37,22.23 59.37,23.97 58.9,24.45 57.63,24.45 53.18,28.89 53.18,30.48 52.07,31.59 52.07,32.54 51.75,32.86 51.12,32.86 50.48,32.23 50.48,28.26 47.94,25.72 C4.2
N$17
  Bottom 0.152: OK3.3 72.71,15.56 70.33,13.18 70.33,11.75 R6.2
N$19
  Top 0.152: S2.2 14.29,32.07 19.37,32.07 LIPO.1
N$20
  Top 0.152: F2.1 11.11,32.7 S2.1
N$21  (via drill 0.35)
  Top 0.152: v11.11,22.7 F2.2
  Bottom 0.152: C9.1 11.56,7.33 CR1.1 | C9.1 13.44,8.79 14.29,7.94 16.16,7.94 D3.C | v11.11,22.7 11.11,19.05 6.03,13.97 4.45,13.97 4.13,13.65 4.13,13.02 8.41,8.73 12.86,8.73 C9.1
N$22  (via drill 0.35)
  Top 0.61: v80.17,28.42 87.15,28.42 S3.2
  Bottom 0.61: LIPO1.1 62.87,29.69 65.25,27.3 79.06,27.3 v80.17,28.42
N$24
  Top 0.61: S3.1 89.69,28.26 89.69,23.5 F1.1
N$25  (via drill 0.35)
  Top 0.61: v80.64,16.83 81.28,16.83 87.95,23.5 F1.2
  Bottom 0.61: C11.1 D4.C 78.79,15.86 CR2.1 79.85,16.03 v80.64,16.83
N$32
  Bottom 0.152: U3.13 40.01,17.94 40.64,18.57 41.91,18.57 1KR.1
N$33
  Bottom 0.152: 1K1.1 44.45,19.05 45.4,20 45.4,21.43 45.24,21.59 41.12,21.59 38.73,19.21 U3.12
N$34
  Bottom 0.152: U3.11 37.47,15.56 36.51,14.61 36.35,14.61 34.29,12.54 34.29,10.16 34.92,9.53 37.31,9.53 40.96,5.87 41.91,5.87 1K2.1
N$35
  Bottom 0.152: 1K3.1 36.83,7.14 33.97,10 33.97,13.34 36.2,15.56 U3.10
N$36
  Bottom 0.152: 1K4.1 34.29,9.21 33.66,9.84 33.66,13.81 34.92,15.08 U3.9
N$37  (via drill 0.35)
  Top 0.152: v40.8,17.78 v35.72,17.78
  Bottom 0.152: v35.72,17.78 36.51,18.57 36.83,18.57 1K5.1 | v40.8,17.78 41.27,17.78 42.55,16.51 U3.15
N$38  (via drill 0.35)
  Top 0.152: v33.97,15.08 34.77,14.29 v40.96,14.29
  Bottom 0.152: 1K6.1 34.29,15.4 v33.97,15.08 | v40.96,14.29 40.96,15.56 41.27,15.88 U3.14
N$43
  Bottom 0.152: U5.13 52.7,16.67 54.61,18.57 1K8.1
N$44
  Bottom 0.152: U5.12 51.44,17.14 53.82,19.53 55.4,19.53 56.2,18.73 57.15,18.73 1K9.1
N$45  (via drill 0.35)
  Top 0.152: v57.47,11.91 55.56,13.81 50.96,13.81 v50.64,14.13
  Bottom 0.152: 1K10.1 54.29,7.3 57.47,10.48 v57.47,11.91 | v50.64,14.13 50.64,14.61 50.16,15.08 U5.11
N$46  (via drill 0.35)
  Top 0.152: v48.26,14.13 v46.67,12.54
  Bottom 0.152: 1K11.1 49.53,7.62 46.67,10.48 v46.67,12.54 | v48.26,14.13 48.26,15.24 48.9,15.88 U5.10
N$47  (via drill 0.35)
  Top 0.152: v45.88,11.91 45.88,14.13 v46.67,14.13
  Bottom 0.152: 1K12.1 46.99,9.68 45.88,10.79 v45.88,11.91 | v46.67,14.13 47.62,15.08 U5.9
N$48
  Bottom 0.152: U5.15 55.24,15.4 53.66,13.81 51.91,13.81 50.8,14.92 50.8,17.3 49.53,18.57 1K13.1
N$49  (via drill 0.35)
  Top 0.152: v46.67,15.08 46.99,14.76 53.02,14.76 v53.34,14.45
  Bottom 0.152: 1K14.1 46.99,15.4 v46.67,15.08 | v53.34,14.45 53.34,15.24 53.98,15.88 U5.14
RESET  (via drill 0.35)
  Top 0.152: v23.97,10.95 21.91,10.95 21.75,10.79 U4.29 | v46.83,31.27 46.35,31.75 42.7,31.75 v42.07,31.11 | v66.99,14.61 65.56,16.03 v30.32,16.03
  Bottom 0.152: R16.1 46.99,27.62 | 46.99,27.62 47.94,27.62 C4.1 | 46.99,27.62 46.99,30.16 S4.2 46.83,30.16 v46.83,31.27 | v23.97,10.95 23.97,11.59 29.37,16.99 | 29.37,16.99 32.23,19.84 32.23,23.02 39.37,30.16 41.12,30.16 | 41.12,30.16 S4.1 41.27,30.16 | 41.12,30.16 v42.07,31.11 | J2.3 69.85,8.26 69.06,9.05 69.06,12.54 v66.99,14.61 | 29.37,16.99 v30.32,16.03
RX  (via drill 0.35)
  Top 0.152: v59.53,7.3 30,7.3 27.62,9.68 23.02,9.68 22.7,9.37 21.91,9.37 21.75,9.21 U4.31 | v62.23,4.6 62.55,4.29 65.41,4.29 65.56,4.45 65.56,5.08 U1.5
  Bottom 0.152: v62.23,4.6 v59.53,7.3
RXLED
  Top 0.152: U1.22 66.99,12.54 66.99,11.43 67.63,10.79 R22.1
SCK  (via drill 0.35)
  Top 0.152: R15.1 3.65,24.5 | 3.65,24.5 5.5,24.5 Q5.3 | 66.12,16.59 67.63,15.08 67.63,14.12 67.31,13.8 60.66,13.8 60.64,13.81 v58.74,11.91 | 66.12,16.59 66.04,16.67 | 28.89,15.56 U4.17 28.84,16.14 29.54,16.84 43.26,16.84 43.56,17.14 65.56,17.14 66.12,16.59 | v3.65,21.59 3.65,24.5
  Bottom 0.152: v58.74,11.91 58.74,5.71 60.48,3.97 | J2.6 60.48,3.97 | v3.65,21.59 3.65,19.53 1.27,17.14 1.27,1.59 1.43,1.43 57.94,1.43 60.48,3.97
SCL  (via drill 0.35)
  Top 0.152: v20.48,11.75 21.43,11.75 21.59,11.59 U4.28 | J5.2 63.82,24.45 17.78,24.45 J4.2
  Bottom 0.152: v20.48,11.75 20.48,21.75 J4.2
SDA  (via drill 0.35)
  Top 0.152: v19.84,12.54 21.43,12.54 21.59,12.38 U4.27 | J5.1 51.75,25.72 50.96,26.51 38.1,26.51 37.31,25.72 30.96,25.72 29.69,26.99 15.24,26.99 J4.1
  Bottom 0.152: v19.84,12.54 19.84,19.84 J4.1
SIG1  (via drill 0.35)
  Top 0.61: v49.85,30.64 49.37,30.64 49.05,30.96 Q9.1 | R5.2 47.94,27.78 v48.9,28.73 v52.55,28.73 | v58.58,23.81 v75.25,23.81
  Bottom 0.61: v49.85,30.64 49.85,29.69 v48.9,28.73 | v75.25,23.81 OK3.8 | v58.58,23.81 57.47,23.81 v52.55,28.73
SIG2  (via drill 0.35)
  Top 0.61: Q8.1 38.58,30.96 38.58,27.78 39.05,27.78 R3.1 38.42,27.62 38.26,27.62 v37.78,27.15 | v58.74,19.53 58.42,19.21 53.02,19.21 v52.39,19.84
  Bottom 0.61: OK3.6 72.71,21.27 70.96,19.53 v58.74,19.53 | v52.39,19.84 49.69,22.54 42.39,22.54 v37.78,27.15
SIG3  (via drill 0.35)
  Top 0.61: v44.77,30.64 44.29,30.64 43.97,30.96 Q7.1 | v44.61,28.73 45.56,27.78 45.72,27.78 R10.1
  Bottom 0.61: v44.61,28.73 44.77,28.89 v44.77,30.64 46.35,32.23 46.99,32.23 48.26,33.5 52.39,33.5 58.74,27.15 58.74,26.35 60.33,24.77 60.33,21.59 61.59,20.32 62.87,20.32 63.5,20.95 OK1.6
SOLARIN  (via drill 0.35)
  Top 0.152: v27.46,17.3 27.3,17.3 27.3,15.56 U4.19 | v29.69,21.27 31.11,22.7 v32.86,22.7
  Bottom 0.152: v27.46,17.3 28.26,17.3 29.69,18.73 v29.69,21.27 | v32.86,22.7 32.86,23.18 37.47,27.78 39.21,27.78 41.27,25.72 | 41.27,25.72 43.5,25.72 R8.1 | 41.27,25.72 R9.1
SP_SIG  (via drill 0.35)
  Top 0.152: v63.5,11.27 32.86,11.27 31.75,10.16 30.64,10.16 30.48,10 U4.11
  Bottom 0.152: v63.5,11.27 65.25,9.53 66.04,9.53 R1.1
SS
  Top 0.152: R21.1 5.62,20.68 Q2.3
TX  (via drill 0.35)
  Top 0.152: v29.05,10 21.75,10 U4.30 | v32.38,6.67 32.7,6.99 58.9,6.99 60.64,5.24 63.02,5.24 U1.1
  Bottom 0.152: v32.38,6.67 v29.05,10
VCC  (via drill 0.35)
  Top 0.152: 2.52,22.52 R15.2 1.59,23.45 1.59,25.35 R26.2 2.54,26.35 3.49,27.3 6.19,27.3 7.96,29.07 7.96,29.27 8.22,29.53 9.68,29.53 10.32,28.89 10.32,25.4 12.54,25.4 14.13,23.81 v28.1,23.81 | 2.52,22.52 2.49,22.54 | R21.2 2.27,18.68 1.59,19.37 1.59,21.59 2.52,22.52 | TX.A RX.A 85.25,10.79 84.3,11.75 76.36,11.75 76.2,11.59 72.55,11.59 v72.55,11.43 68.58,11.43 68.26,11.75 68.28,11.77 U1.20 | R21.2 3.86,20 11.38,20 R14.2 13.65,17.73 v13.65,2.86 | 25.72,7.78 25.72,6.83 U4.4 | 25.72,7.78 26.83,7.78 27.15,7.46 27.15,6.83 U4.6 | v25.72,8.1 25.72,7.78 | R21.2 v2.54,17.46 | 65.09,6.19 65.09,5.24 U1.4 | 65.09,6.19 71.91,6.19 72.39,5.71 J2.2 | v28.1,18.1 28.1,17.14 | 28.1,17.14 28.1,15.56 U4.18 | v44.77,14.92 v44.77,12.54 | J5.7 75.88,23.81 75.88,23.18 75.56,22.86 v58.58,22.86 | 28.1,17.14 42.7,17.14 v43.18,17.62 | v64.29,6.99 65.09,6.19
  Bottom 0.152: C3.1 C13.1 C10.1 18.1,4.6 20.64,4.6 24.13,8.1 v25.72,8.1 | CR1.2 11.94,2.83 C3.1 | C3.1 v13.65,2.86 | v2.54,17.46 2.54,15.08 IC3.3 | J2.2 72.39,11.27 v72.55,11.43 | v28.1,18.1 v28.1,23.81 28.1,24.61 J4.7 | 1K7.1 44.45,12.22 v44.77,12.54 | 54.13,22.86 56.2,20.8 56.2,20 56.67,19.53 57.94,19.53 58.1,19.37 58.1,17.62 56.52,16.03 U5.16 | 54.13,22.86 53.82,23.18 48.26,23.18 R16.2 | 54.13,22.86 v58.58,22.86 | 56.36,15.4 56.52,15.56 U5.16 | 56.36,15.4 54.45,13.49 46.2,13.49 v44.77,14.92 43.81,15.88 U3.16 43.81,16.03 43.18,16.67 v43.18,17.62 | v64.29,6.99 59.37,11.91 59.37,12.38 56.36,15.4 | 56.36,15.4 U5.16

## Text on the board
tNames: Controls | MOTOR | SDA | SCL | SHDN | GND | VCC | 62mA | SDA | SCL | SHDN | GND | 500mA | DRS / 2017-1018 / rev1 | SCK | MISO | MOSI | RST | 5V | GND
bNames: 7.1 | V_IN | GND | SIG | VDD | GND | SIG | GND | SIG | 11.1 | GND | GND | SDA | SCL | SHDN | GND | VCC | SDA | SCL | SHDN | GND | VCC | SCK | MISO | MOSI | RST | 5V | GND